# Altium PCB ZIF_to_2xZIF.PcbDoc (part 2 of 3)
Units mil, origin at the board's own origin, x right, y up, seen from the top; angles counter-clockwise.
Board outline 1622.05 x 16535.43 mil, 2 copper layers (Top Layer, Bottom Layer), stack 3.189 mil thick; 3 components, 51 nets, 153 pads, 51 vias.
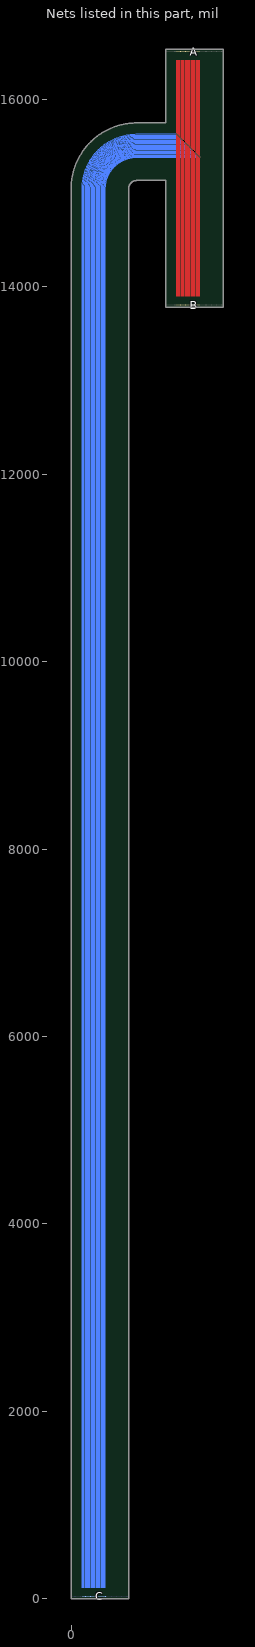
[diagram p2: the nets of this part, all layers, seen from the top]

## Via types
v1: diameter 11.81, hole 3.94, Top Layer to Bottom Layer, 51 vias

## Nets (pads, with @x,y where several pads share a name; then routed paths per layer and width w, separated by ;. In a path a pad name is that pad's centre, name@x,y a point inside that pad or via, vN(x,y) a via of type N, cw(c..) or ccw(c..) an arc to the next point about the centre after c; other vN are vias at no path point) (continued)
FPC_10: A.10 B.10 C.10 | length 18783.4
  Top Layer w3.94: 1125.98,15110.24 1125.98,15759.84
  Top Layer w7.87: 1125.98,13899.61 1125.98,15110.24 ; 1125.98,15759.84 1125.98,16415.35
  Bottom Layer w3.94: 118.11,14881.89 118.11,15047.24 118.2,15057.41 118.47,15067.58 118.91,15077.74 119.53,15087.89 120.33,15098.03 121.3,15108.15 122.45,15118.25 123.78,15128.34 125.28,15138.39 126.96,15148.42 128.82,15158.42 130.84,15168.39 133.04,15178.32 135.42,15188.21 137.96,15198.05 140.68,15207.85 143.57,15217.6 146.63,15227.3 149.86,15236.95 153.25,15246.53 156.81,15256.06 160.54,15265.52 164.43,15274.91 168.49,15284.24 172.7,15293.49 177.08,15302.67 181.62,15311.77 186.31,15320.79 191.17,15329.73 196.17,15338.58 201.34,15347.34 206.65,15356.02 212.11,15364.59 217.73,15373.07 223.49,15381.45 229.39,15389.73 235.44,15397.91 241.63,15405.98 247.96,15413.93 254.43,15421.78 261.04,15429.51 267.77,15437.13 274.64,15444.63 281.64,15452.01 288.77,15459.26 296.03,15466.39 303.4,15473.39 310.9,15480.26 318.52,15487 326.25,15493.6 334.1,15500.07 342.06,15506.4 350.12,15512.59 358.3,15518.64 366.58,15524.55 374.96,15530.31 383.44,15535.92 392.02,15541.38 400.69,15546.7 409.45,15551.86 418.3,15556.86 427.24,15561.72 436.26,15566.41 445.36,15570.95 454.54,15575.33 463.79,15579.55 473.12,15583.6 482.51,15587.49 491.97,15591.22 501.5,15594.78 511.09,15598.18 520.73,15601.4 530.43,15604.46 540.18,15607.35 549.98,15610.07 559.83,15612.61 569.71,15614.99 579.64,15617.19 589.61,15619.22 599.61,15621.07 609.64,15622.75 619.69,15624.25 629.78,15625.58 639.88,15626.73 650,15627.7 660.14,15628.5 670.29,15629.12 680.45,15629.57 690.62,15629.83 700.79,15629.92 v1(1125.98,15629.92)
  Bottom Layer w7.87: 118.11,120.08 118.11,14881.89
FPC_11: A.11 B.11 C.11 | length 18776.6
  Top Layer w3.94: 1137.8,15110.24 1137.8,15759.84
  Top Layer w7.87: 1137.8,13899.61 1137.8,15110.24 ; 1137.8,15759.84 1137.8,16415.35
  Bottom Layer w3.94: 129.92,14881.89 129.92,15047.24 130.01,15057.21 130.27,15067.17 130.7,15077.12 131.31,15087.07 132.09,15097 133.05,15106.92 134.18,15116.82 135.48,15126.69 136.95,15136.55 138.59,15146.37 140.41,15156.17 142.4,15165.93 144.55,15175.66 146.88,15185.35 149.37,15195 152.04,15204.6 154.87,15214.15 157.86,15223.65 161.02,15233.1 164.35,15242.49 167.84,15251.82 171.49,15261.09 175.3,15270.3 179.28,15279.44 183.41,15288.5 187.7,15297.5 192.14,15306.41 196.74,15315.25 201.5,15324.01 206.4,15332.68 211.46,15341.26 216.67,15349.76 222.02,15358.16 227.52,15366.47 233.16,15374.68 238.95,15382.79 244.87,15390.8 250.94,15398.7 257.14,15406.5 263.48,15414.19 269.95,15421.77 276.55,15429.23 283.28,15436.57 290.14,15443.8 297.12,15450.91 304.23,15457.89 311.46,15464.75 318.8,15471.48 326.27,15478.08 333.84,15484.55 341.53,15490.89 349.33,15497.09 357.23,15503.16 365.24,15509.08 373.35,15514.87 381.56,15520.51 389.87,15526.01 398.27,15531.37 406.77,15536.57 415.35,15541.63 424.03,15546.53 432.78,15551.29 441.62,15555.89 450.54,15560.34 459.53,15564.62 468.6,15568.76 477.73,15572.73 486.94,15576.54 496.21,15580.19 505.54,15583.68 514.93,15587.01 524.38,15590.17 533.88,15593.17 543.44,15596 553.04,15598.66 562.68,15601.15 572.37,15603.48 582.1,15605.64 591.86,15607.62 601.66,15609.44 611.48,15611.08 621.34,15612.55 631.22,15613.86 641.12,15614.98 651.03,15615.94 660.97,15616.72 670.91,15617.33 680.86,15617.76 690.82,15618.02 700.79,15618.11 v1(1137.8,15618.11)
  Bottom Layer w7.87: 129.92,120.08 129.92,14881.89
FPC_12: A.12 B.12 C.12 | length 18769.9
  Top Layer w3.94: 1149.61,15110.24 1149.61,15759.84
  Top Layer w7.87: 1149.61,13899.61 1149.61,15110.24 ; 1149.61,15759.84 1149.61,16415.35
  Bottom Layer w3.94: 141.73,14881.89 141.73,15047.24 141.82,15057 142.07,15066.75 142.5,15076.5 143.09,15086.24 143.86,15095.97 144.79,15105.68 145.9,15115.38 147.17,15125.05 148.62,15134.7 150.23,15144.32 152,15153.92 153.95,15163.48 156.06,15173 158.34,15182.49 160.78,15191.94 163.39,15201.34 166.16,15210.7 169.09,15220 172.19,15229.25 175.45,15238.45 178.86,15247.59 182.44,15256.67 186.17,15265.68 190.07,15274.63 194.11,15283.51 198.31,15292.32 202.67,15301.05 207.17,15309.7 211.83,15318.28 216.63,15326.77 221.58,15335.18 226.68,15343.5 231.92,15351.73 237.31,15359.86 242.84,15367.9 248.5,15375.85 254.31,15383.69 260.25,15391.43 266.32,15399.07 272.53,15406.6 278.86,15414.02 285.33,15421.33 291.92,15428.52 298.64,15435.6 305.48,15442.56 312.44,15449.39 319.51,15456.11 326.71,15462.7 334.01,15469.17 341.43,15475.51 348.96,15481.71 356.6,15487.79 364.34,15493.73 372.18,15499.53 380.13,15505.2 388.17,15510.72 396.3,15516.11 404.53,15521.35 412.85,15526.45 421.26,15531.4 429.75,15536.2 438.33,15540.86 446.98,15545.37 455.71,15549.72 464.52,15553.92 473.4,15557.97 482.35,15561.86 491.36,15565.59 500.44,15569.17 509.58,15572.58 518.78,15575.84 528.03,15578.94 537.34,15581.87 546.69,15584.64 556.09,15587.25 565.54,15589.69 575.03,15591.97 584.55,15594.08 594.11,15596.03 603.71,15597.81 613.33,15599.42 622.98,15600.86 632.66,15602.13 642.35,15603.24 652.06,15604.17 661.79,15604.94 671.53,15605.53 681.28,15605.96 691.03,15606.21 700.79,15606.3 v1(1149.61,15606.3)
  Bottom Layer w7.87: 141.73,120.08 141.73,14881.89
FPC_13: A.13 B.13 C.13 | length 18763.1
  Top Layer w3.94: 1161.42,15110.24 1161.42,15759.84
  Top Layer w7.87: 1161.42,13899.61 1161.42,15110.24 ; 1161.42,15759.84 1161.42,16415.35
  Bottom Layer w3.94: 153.54,14881.89 153.54,15047.24 153.63,15056.79 153.88,15066.34 154.29,15075.88 154.88,15085.42 155.63,15094.94 156.54,15104.45 157.62,15113.94 158.87,15123.41 160.28,15132.85 161.86,15142.27 163.6,15151.66 165.5,15161.02 167.57,15170.35 169.8,15179.63 172.19,15188.88 174.74,15198.08 177.46,15207.24 180.33,15216.35 183.36,15225.41 186.55,15234.41 189.89,15243.36 193.39,15252.25 197.05,15261.07 200.85,15269.83 204.82,15278.52 208.93,15287.14 213.19,15295.69 217.6,15304.16 222.16,15312.55 226.86,15320.87 231.71,15329.1 236.7,15337.24 241.83,15345.29 247.1,15353.26 252.51,15361.13 258.06,15368.91 263.74,15376.58 269.55,15384.16 275.5,15391.64 281.57,15399.01 287.78,15406.27 294.11,15413.42 300.56,15420.46 307.13,15427.39 313.83,15434.2 320.64,15440.9 327.57,15447.47 334.61,15453.93 341.76,15460.25 349.03,15466.46 356.4,15472.53 363.87,15478.48 371.45,15484.29 379.13,15489.97 386.9,15495.52 394.77,15500.93 402.74,15506.2 410.79,15511.33 418.94,15516.32 427.17,15521.17 435.48,15525.87 443.87,15530.43 452.34,15534.84 460.89,15539.1 469.51,15543.22 478.2,15547.18 486.96,15550.98 495.79,15554.64 504.67,15558.14 513.62,15561.49 522.62,15564.67 531.68,15567.7 540.79,15570.58 549.95,15573.29 559.15,15575.84 568.4,15578.23 577.68,15580.46 587.01,15582.53 596.37,15584.43 605.76,15586.17 615.18,15587.75 624.63,15589.16 634.1,15590.41 643.58,15591.49 653.09,15592.41 662.61,15593.16 672.15,15593.74 681.69,15594.15 691.24,15594.4 700.79,15594.49 v1(1161.42,15594.49)
  Bottom Layer w7.87: 153.54,120.08 153.54,14881.89
FPC_14: A.14 B.14 C.14 | length 18756.4
  Top Layer w3.94: 1173.23,15110.24 1173.23,15759.84
  Top Layer w7.87: 1173.23,13899.61 1173.23,15110.24 ; 1173.23,15759.84 1173.23,16415.35
  Bottom Layer w3.94: 165.35,14881.89 165.35,15047.24 165.44,15056.59 165.68,15065.93 166.09,15075.27 166.66,15084.59 167.39,15093.91 168.29,15103.21 169.35,15112.5 170.57,15121.76 171.95,15131 173.49,15140.22 175.19,15149.41 177.05,15158.57 179.08,15167.69 181.26,15176.78 183.6,15185.82 186.1,15194.83 188.75,15203.79 191.56,15212.7 194.53,15221.56 197.64,15230.37 200.92,15239.13 204.34,15247.82 207.92,15256.45 211.65,15265.02 215.52,15273.53 219.54,15281.96 223.71,15290.33 228.03,15298.61 232.49,15306.83 237.09,15314.96 241.83,15323.01 246.71,15330.98 251.74,15338.86 256.89,15346.65 262.19,15354.36 267.61,15361.96 273.17,15369.48 278.86,15376.89 284.68,15384.2 290.62,15391.41 296.69,15398.52 302.88,15405.52 309.2,15412.41 315.63,15419.19 322.18,15425.85 328.84,15432.4 335.62,15438.84 342.51,15445.15 349.51,15451.34 356.62,15457.41 363.83,15463.35 371.14,15469.17 378.56,15474.86 386.07,15480.42 393.68,15485.85 401.38,15491.14 409.17,15496.3 417.05,15501.32 425.02,15506.2 433.07,15510.94 441.2,15515.54 449.42,15520 457.71,15524.32 466.07,15528.49 474.5,15532.51 483.01,15536.39 491.58,15540.11 500.21,15543.69 508.91,15547.11 517.66,15550.39 526.47,15553.51 535.33,15556.47 544.24,15559.28 553.2,15561.94 562.21,15564.43 571.25,15566.77 580.34,15568.95 589.46,15570.98 598.62,15572.84 607.81,15574.54 617.03,15576.09 626.27,15577.47 635.53,15578.69 644.82,15579.74 654.12,15580.64 663.44,15581.37 672.76,15581.94 682.1,15582.35 691.44,15582.6 700.79,15582.68 v1(1173.23,15582.68)
  Bottom Layer w7.87: 165.35,120.08 165.35,14881.89
FPC_15: A.15 B.15 C.15 | length 18749.7
  Top Layer w3.94: 1185.04,15110.24 1185.04,15759.84
  Top Layer w7.87: 1185.04,13899.61 1185.04,15110.24 ; 1185.04,15759.84 1185.04,16415.35
  Bottom Layer w3.94: 177.17,14881.89 177.17,15047.24 177.25,15056.38 177.48,15065.52 177.88,15074.65 178.44,15083.77 179.16,15092.88 180.03,15101.98 181.07,15111.06 182.26,15120.12 183.61,15129.16 185.12,15138.17 186.79,15147.16 188.61,15156.11 190.59,15165.03 192.72,15173.92 195.01,15182.77 197.45,15191.57 200.05,15200.34 202.79,15209.05 205.69,15217.72 208.74,15226.33 211.94,15234.89 215.29,15243.4 218.79,15251.84 222.43,15260.22 226.22,15268.54 230.16,15276.78 234.24,15284.96 238.46,15293.07 242.82,15301.1 247.32,15309.06 251.96,15316.93 256.73,15324.72 261.64,15332.43 266.69,15340.05 271.86,15347.58 277.17,15355.02 282.6,15362.37 288.17,15369.62 293.86,15376.77 299.67,15383.82 305.6,15390.77 311.66,15397.62 317.83,15404.35 324.13,15410.98 330.53,15417.5 337.05,15423.91 343.68,15430.2 350.42,15436.37 357.26,15442.43 364.21,15448.36 371.26,15454.17 378.41,15459.86 385.66,15465.43 393.01,15470.86 400.45,15476.17 407.98,15481.35 415.6,15486.39 423.31,15491.3 431.1,15496.08 438.98,15500.71 446.93,15505.21 454.96,15509.57 463.07,15513.79 471.25,15517.87 479.5,15521.81 487.81,15525.6 496.19,15529.24 504.64,15532.74 513.14,15536.09 521.7,15539.29 530.31,15542.34 538.98,15545.24 547.7,15547.99 556.46,15550.58 565.26,15553.02 574.11,15555.31 583,15557.45 591.92,15559.42 600.88,15561.25 609.86,15562.91 618.87,15564.42 627.91,15565.77 636.97,15566.96 646.05,15568 655.15,15568.87 664.26,15569.59 673.38,15570.15 682.51,15570.55 691.65,15570.79 700.79,15570.87 v1(1185.04,15570.87)
  Bottom Layer w7.87: 177.17,120.08 177.17,14881.89
FPC_16: A.16 B.16 C.16 | length 18742.9
  Top Layer w3.94: 1196.85,15110.24 1196.85,15759.84
  Top Layer w7.87: 1196.85,13899.61 1196.85,15110.24 ; 1196.85,15759.84 1196.85,16415.35
  Bottom Layer w3.94: 188.98,14881.89 188.98,15047.24 189.05,15056.18 189.29,15065.11 189.68,15074.03 190.22,15082.95 190.92,15091.85 191.78,15100.74 192.79,15109.62 193.96,15118.47 195.28,15127.31 196.75,15136.12 198.38,15144.9 200.16,15153.66 202.09,15162.38 204.18,15171.06 206.42,15179.71 208.8,15188.32 211.34,15196.88 214.03,15205.4 216.86,15213.87 219.84,15222.29 222.97,15230.66 226.24,15238.97 229.66,15247.22 233.22,15255.42 236.93,15263.54 240.77,15271.61 244.76,15279.6 248.89,15287.52 253.15,15295.38 257.55,15303.15 262.08,15310.85 266.75,15318.46 271.55,15326 276.48,15333.45 281.54,15340.81 286.72,15348.08 292.04,15355.26 297.47,15362.35 303.04,15369.34 308.72,15376.23 314.52,15383.02 320.44,15389.71 326.47,15396.3 332.62,15402.78 338.88,15409.15 345.25,15415.41 351.73,15421.56 358.32,15427.59 365.01,15433.51 371.8,15439.31 378.69,15445 385.69,15450.56 392.77,15455.99 399.95,15461.31 407.22,15466.5 414.59,15471.55 422.04,15476.48 429.57,15481.28 437.19,15485.95 444.88,15490.49 452.66,15494.88 460.51,15499.15 468.43,15503.27 476.42,15507.26 484.49,15511.1 492.62,15514.81 500.81,15518.37 509.06,15521.79 517.37,15525.06 525.74,15528.19 534.16,15531.17 542.63,15534.01 551.15,15536.69 559.71,15539.23 568.32,15541.62 576.97,15543.85 585.65,15545.94 594.38,15547.87 603.13,15549.65 611.91,15551.28 620.72,15552.75 629.56,15554.07 638.41,15555.24 647.29,15556.25 656.18,15557.11 665.09,15557.81 674,15558.35 682.93,15558.74 691.86,15558.98 700.79,15559.06 v1(1196.85,15559.06)
  Bottom Layer w7.87: 188.98,120.08 188.98,14881.89
FPC_17: A.17 B.17 C.17 | length 18736.2
  Top Layer w3.94: 1208.66,15110.24 1208.66,15759.84
  Top Layer w7.87: 1208.66,13899.61 1208.66,15110.24 ; 1208.66,15759.84 1208.66,16415.35
  Bottom Layer w3.94: 200.79,14881.89 200.79,15047.24 200.86,15055.97 201.09,15064.69 201.47,15073.41 202.01,15082.12 202.69,15090.82 203.53,15099.51 204.51,15108.18 205.65,15116.83 206.94,15125.46 208.38,15134.07 209.97,15142.65 211.71,15151.2 213.6,15159.72 215.64,15168.2 217.82,15176.65 220.16,15185.06 222.63,15193.43 225.26,15201.75 228.03,15210.03 230.94,15218.25 234,15226.43 237.2,15234.55 240.53,15242.61 244.01,15250.61 247.63,15258.55 251.39,15266.43 255.28,15274.24 259.31,15281.98 263.48,15289.65 267.77,15297.24 272.2,15304.76 276.76,15312.2 281.45,15319.56 286.27,15326.84 291.21,15334.03 296.28,15341.14 301.47,15348.15 306.78,15355.07 312.21,15361.9 317.77,15368.64 323.43,15375.27 329.21,15381.81 335.11,15388.24 341.12,15394.57 347.23,15400.8 353.46,15406.91 359.79,15412.92 366.22,15418.82 372.76,15424.6 379.39,15430.27 386.13,15435.82 392.96,15441.25 399.88,15446.56 406.89,15451.75 414,15456.82 421.19,15461.76 428.47,15466.58 435.83,15471.27 443.27,15475.83 450.79,15480.26 458.38,15484.55 466.05,15488.72 473.79,15492.75 481.6,15496.64 489.48,15500.4 497.42,15504.02 505.42,15507.5 513.48,15510.84 521.6,15514.03 529.78,15517.09 538,15520 546.28,15522.77 554.6,15525.4 562.97,15527.87 571.38,15530.21 579.83,15532.39 588.31,15534.43 596.83,15536.32 605.38,15538.06 613.96,15539.65 622.57,15541.09 631.2,15542.38 639.85,15543.52 648.52,15544.5 657.21,15545.34 665.91,15546.03 674.62,15546.56 683.34,15546.94 692.06,15547.17 700.79,15547.24 v1(1208.66,15547.24)
  Bottom Layer w7.87: 200.79,120.08 200.79,14881.89
FPC_18: A.18 B.18 C.18 | length 18729.4
  Top Layer w3.94: 1220.47,15110.24 1220.47,15759.84
  Top Layer w7.87: 1220.47,13899.61 1220.47,15110.24 ; 1220.47,15759.84 1220.47,16415.35
  Bottom Layer w3.94: 212.6,14881.89 212.6,15047.24 212.67,15055.76 212.9,15064.28 213.27,15072.79 213.79,15081.3 214.46,15089.79 215.27,15098.27 216.24,15106.74 217.35,15115.19 218.61,15123.61 220.02,15132.02 221.57,15140.39 223.27,15148.74 225.11,15157.06 227.1,15165.35 229.23,15173.6 231.51,15181.81 233.93,15189.98 236.49,15198.1 239.2,15206.18 242.04,15214.21 245.02,15222.2 248.15,15230.12 251.41,15237.99 254.8,15245.81 258.34,15253.56 262.01,15261.25 265.81,15268.88 269.74,15276.43 273.81,15283.92 278,15291.34 282.33,15298.68 286.78,15305.94 291.36,15313.13 296.06,15320.24 300.89,15327.26 305.83,15334.19 310.9,15341.04 316.09,15347.8 321.39,15354.47 326.81,15361.05 332.35,15367.52 337.99,15373.91 343.75,15380.19 349.61,15386.37 355.59,15392.45 361.66,15398.42 367.84,15404.28 374.13,15410.04 380.51,15415.68 386.99,15421.22 393.56,15426.64 400.23,15431.94 406.99,15437.13 413.84,15442.2 420.77,15447.15 427.8,15451.97 434.9,15456.67 442.09,15461.25 449.35,15465.7 456.69,15470.03 464.11,15474.22 471.6,15478.29 479.15,15482.22 486.78,15486.03 494.47,15489.69 502.22,15493.23 510.04,15496.62 517.91,15499.89 525.84,15503.01 533.82,15505.99 541.85,15508.84 549.93,15511.54 558.05,15514.1 566.22,15516.52 574.43,15518.8 582.68,15520.93 590.97,15522.92 599.29,15524.76 607.64,15526.46 616.01,15528.02 624.42,15529.42 632.84,15530.68 641.29,15531.79 649.76,15532.76 658.24,15533.58 666.73,15534.24 675.24,15534.76 683.75,15535.14 692.27,15535.36 700.79,15535.43 v1(1220.47,15535.43)
  Bottom Layer w7.87: 212.6,120.08 212.6,14881.89
FPC_19: A.19 B.19 C.19 | length 18722.7
  Top Layer w3.94: 1232.28,15110.24 1232.28,15759.84
  Top Layer w7.87: 1232.28,13899.61 1232.28,15110.24 ; 1232.28,15759.84 1232.28,16415.35
  Bottom Layer w3.94: 224.41,14881.89 224.41,15047.24 224.48,15055.56 224.7,15063.87 225.06,15072.18 225.57,15080.47 226.22,15088.76 227.02,15097.04 227.96,15105.3 229.05,15113.54 230.27,15121.77 231.65,15129.97 233.16,15138.14 234.82,15146.29 236.62,15154.41 238.56,15162.49 240.64,15170.54 242.86,15178.55 245.22,15186.52 247.72,15194.45 250.36,15202.34 253.14,15210.17 256.05,15217.96 259.1,15225.7 262.28,15233.38 265.59,15241 269.04,15248.57 272.62,15256.07 276.33,15263.52 280.17,15270.89 284.14,15278.2 288.23,15285.43 292.45,15292.6 296.8,15299.69 301.26,15306.7 305.85,15313.63 310.56,15320.48 315.39,15327.25 320.34,15333.94 325.4,15340.53 330.57,15347.04 335.86,15353.45 341.26,15359.78 346.77,15366 352.39,15372.13 358.11,15378.16 363.94,15384.09 369.87,15389.92 375.9,15395.64 382.03,15401.26 388.26,15406.77 394.58,15412.17 400.99,15417.46 407.5,15422.64 414.1,15427.7 420.78,15432.64 427.55,15437.47 434.4,15442.18 441.33,15446.77 448.35,15451.24 455.43,15455.58 462.6,15459.8 469.83,15463.89 477.14,15467.86 484.52,15471.7 491.96,15475.41 499.46,15478.99 507.03,15482.44 514.65,15485.75 522.33,15488.93 530.07,15491.98 537.86,15494.89 545.69,15497.67 553.58,15500.31 561.51,15502.81 569.48,15505.17 577.49,15507.39 585.54,15509.47 593.63,15511.41 601.74,15513.21 609.89,15514.87 618.07,15516.38 626.27,15517.76 634.49,15518.99 642.73,15520.07 650.99,15521.01 659.27,15521.81 667.56,15522.46 675.86,15522.97 684.16,15523.33 692.47,15523.55 700.79,15523.62 v1(1232.28,15523.62)
  Bottom Layer w7.87: 224.41,120.08 224.41,14881.89
FPC_20: A.20 B.20 C.20 | length 18716
  Top Layer w3.94: 1244.09,15110.24 1244.09,15759.84
  Top Layer w7.87: 1244.09,13899.61 1244.09,15110.24 ; 1244.09,15759.84 1244.09,16415.35
  Bottom Layer w3.94: 236.22,14881.89 236.22,15047.24 236.29,15055.35 236.5,15063.46 236.86,15071.56 237.35,15079.65 237.99,15087.73 238.77,15095.8 239.68,15103.86 240.74,15111.9 241.94,15119.92 243.28,15127.92 244.76,15135.89 246.37,15143.83 248.13,15151.75 250.02,15159.63 252.05,15167.48 254.22,15175.3 256.52,15183.07 258.96,15190.8 261.53,15198.49 264.24,15206.14 267.08,15213.73 270.05,15221.27 273.15,15228.76 276.38,15236.2 279.75,15243.58 283.24,15250.9 286.86,15258.15 290.6,15265.35 294.47,15272.47 298.46,15279.53 302.58,15286.51 306.81,15293.43 311.17,15300.27 315.64,15307.03 320.24,15313.71 324.94,15320.31 329.77,15326.83 334.7,15333.26 339.75,15339.61 344.91,15345.86 350.17,15352.03 355.55,15358.1 361.02,15364.08 366.61,15369.96 372.29,15375.74 378.07,15381.43 383.95,15387.01 389.93,15392.48 396,15397.86 402.17,15403.12 408.43,15408.28 414.77,15413.33 421.2,15418.26 427.72,15423.09 434.32,15427.8 441,15432.39 447.77,15436.86 454.6,15441.22 461.52,15445.46 468.5,15449.57 475.56,15453.56 482.69,15457.43 489.88,15461.18 497.13,15464.79 504.45,15468.28 511.83,15471.65 519.27,15474.88 526.76,15477.98 534.3,15480.95 541.9,15483.79 549.54,15486.5 557.23,15489.07 564.96,15491.51 572.74,15493.81 580.55,15495.98 588.4,15498.01 596.28,15499.9 604.2,15501.66 612.14,15503.28 620.12,15504.75 628.11,15506.09 636.13,15507.29 644.17,15508.35 652.23,15509.27 660.3,15510.04 668.38,15510.68 676.47,15511.17 684.57,15511.53 692.68,15511.74 700.79,15511.81 v1(1244.09,15511.81)
  Bottom Layer w7.87: 236.22,120.08 236.22,14881.89
FPC_21: A.21 B.21 C.21 | length 18709.2
  Top Layer w3.94: 1255.91,15110.24 1255.91,15759.84
  Top Layer w7.87: 1255.91,13899.61 1255.91,15110.24 ; 1255.91,15759.84 1255.91,16415.35
  Bottom Layer w3.94: 248.03,14881.89 248.03,15047.24 248.1,15055.15 248.31,15063.05 248.65,15070.94 249.13,15078.83 249.75,15086.7 250.51,15094.57 251.41,15102.42 252.44,15110.26 253.61,15118.07 254.91,15125.86 256.35,15133.63 257.93,15141.38 259.64,15149.09 261.48,15156.78 263.46,15164.43 265.57,15172.04 267.81,15179.62 270.19,15187.15 272.7,15194.65 275.34,15202.1 278.1,15209.5 281,15216.85 284.02,15224.15 287.17,15231.4 290.45,15238.59 293.85,15245.72 297.38,15252.79 301.03,15259.8 304.8,15266.74 308.69,15273.62 312.7,15280.43 316.83,15287.17 321.07,15293.83 325.44,15300.42 329.91,15306.93 334.5,15313.37 339.2,15319.72 344.01,15325.99 348.93,15332.17 353.96,15338.27 359.09,15344.28 364.32,15350.2 369.66,15356.02 375.1,15361.75 380.64,15367.39 386.28,15372.93 392.01,15378.37 397.83,15383.71 403.75,15388.94 409.76,15394.08 415.86,15399.1 422.04,15404.02 428.31,15408.83 434.66,15413.53 441.1,15418.12 447.61,15422.6 454.2,15426.96 460.86,15431.2 467.6,15435.33 474.41,15439.34 481.29,15443.23 488.23,15447 495.24,15450.65 502.31,15454.18 509.44,15457.58 516.63,15460.86 523.88,15464.01 531.18,15467.03 538.53,15469.93 545.94,15472.7 553.38,15475.33 560.88,15477.84 568.41,15480.22 575.99,15482.46 583.61,15484.57 591.26,15486.55 598.94,15488.4 606.65,15490.11 614.4,15491.68 622.17,15493.12 629.96,15494.43 637.78,15495.59 645.61,15496.63 653.46,15497.52 661.33,15498.28 669.2,15498.9 677.09,15499.38 684.99,15499.72 692.89,15499.93 700.79,15500 v1(1255.91,15500)
  Bottom Layer w7.87: 248.03,120.08 248.03,14881.89
FPC_22: A.22 B.22 C.22 | length 18702.5
  Top Layer w3.94: 1267.72,15110.24 1267.72,15759.84
  Top Layer w7.87: 1267.72,13899.61 1267.72,15110.24 ; 1267.72,15759.84 1267.72,16415.35
  Bottom Layer w3.94: 259.84,14881.89 259.84,15047.24 259.91,15054.94 260.11,15062.63 260.45,15070.32 260.92,15078 261.52,15085.67 262.26,15093.34 263.13,15100.98 264.13,15108.61 265.27,15116.22 266.54,15123.81 267.94,15131.38 269.48,15138.92 271.14,15146.44 272.94,15153.92 274.87,15161.37 276.92,15168.78 279.11,15176.16 281.42,15183.5 283.87,15190.8 286.43,15198.06 289.13,15205.26 291.95,15212.42 294.9,15219.53 297.96,15226.59 301.16,15233.6 304.47,15240.54 307.9,15247.43 311.46,15254.26 315.13,15261.02 318.92,15267.72 322.82,15274.35 326.84,15280.91 330.98,15287.4 335.23,15293.82 339.59,15300.16 344.06,15306.42 348.63,15312.61 353.32,15318.72 358.11,15324.74 363,15330.68 368,15336.53 373.1,15342.29 378.3,15347.97 383.6,15353.55 388.99,15359.04 394.48,15364.43 400.06,15369.73 405.74,15374.93 411.5,15380.03 417.35,15385.03 423.29,15389.92 429.31,15394.71 435.42,15399.4 441.61,15403.98 447.87,15408.44 454.21,15412.8 460.63,15417.05 467.12,15421.19 473.68,15425.21 480.31,15429.11 487.01,15432.9 493.78,15436.58 500.6,15440.13 507.49,15443.56 514.44,15446.88 521.44,15450.07 528.5,15453.14 535.61,15456.08 542.77,15458.9 549.98,15461.6 557.23,15464.17 564.53,15466.61 571.87,15468.92 579.25,15471.11 586.66,15473.16 594.11,15475.09 601.6,15476.89 609.11,15478.55 616.65,15480.09 624.22,15481.49 631.81,15482.76 639.42,15483.9 647.05,15484.9 654.7,15485.77 662.36,15486.51 670.03,15487.11 677.71,15487.58 685.4,15487.92 693.09,15488.12 700.79,15488.19 v1(1267.72,15488.19)
  Bottom Layer w7.87: 259.84,120.08 259.84,14881.89
FPC_23: A.23 B.23 C.23 | length 18695.7
  Top Layer w3.94: 1279.53,15110.24 1279.53,15759.84
  Top Layer w7.87: 1279.53,13899.61 1279.53,15110.24 ; 1279.53,15759.84 1279.53,16415.35
  Bottom Layer w3.94: 271.65,14881.89 271.65,15047.24 271.72,15054.73 271.92,15062.22 272.24,15069.7 272.7,15077.18 273.29,15084.65 274,15092.1 274.85,15099.54 275.83,15106.97 276.94,15114.38 278.17,15121.76 279.54,15129.13 281.03,15136.47 282.65,15143.78 284.4,15151.06 286.28,15158.31 288.28,15165.53 290.4,15172.71 292.66,15179.85 295.03,15186.96 297.53,15194.02 300.16,15201.03 302.9,15208 305.77,15214.92 308.75,15221.79 311.86,15228.6 315.08,15235.36 318.43,15242.07 321.88,15248.71 325.46,15255.29 329.15,15261.81 332.95,15268.26 336.86,15274.65 340.89,15280.97 345.02,15287.21 349.26,15293.39 353.61,15299.48 358.07,15305.5 362.63,15311.45 367.29,15317.31 372.05,15323.09 376.92,15328.78 381.88,15334.39 386.94,15339.91 392.09,15345.35 397.34,15350.69 402.69,15355.94 408.12,15361.09 413.64,15366.15 419.25,15371.12 424.95,15375.98 430.72,15380.74 436.59,15385.41 442.53,15389.97 448.55,15394.42 454.65,15398.77 460.82,15403.01 467.06,15407.15 473.38,15411.17 479.77,15415.08 486.22,15418.88 492.74,15422.57 499.32,15426.15 505.96,15429.61 512.67,15432.95 519.43,15436.17 526.24,15439.28 533.11,15442.26 540.03,15445.13 547,15447.88 554.01,15450.5 561.08,15453 568.18,15455.37 575.32,15457.63 582.5,15459.75 589.72,15461.76 596.97,15463.63 604.25,15465.38 611.57,15467 618.9,15468.49 626.27,15469.86 633.66,15471.09 641.06,15472.2 648.49,15473.18 655.93,15474.03 663.39,15474.75 670.85,15475.33 678.33,15475.79 685.81,15476.12 693.3,15476.31 700.79,15476.38 v1(1279.53,15476.38)
  Bottom Layer w7.87: 271.65,120.08 271.65,14881.89
FPC_24: A.24 B.24 C.24 | length 18689
  Top Layer w3.94: 1291.34,15110.24 1291.34,15759.84
  Top Layer w7.87: 1291.34,13899.61 1291.34,15110.24 ; 1291.34,15759.84 1291.34,16415.35
  Bottom Layer w3.94: 283.46,14881.89 283.46,15047.24 283.53,15054.53 283.72,15061.81 284.04,15069.09 284.48,15076.36 285.05,15083.62 285.75,15090.87 286.58,15098.1 287.53,15105.32 288.6,15112.53 289.8,15119.71 291.13,15126.87 292.58,15134.01 294.16,15141.12 295.86,15148.2 297.68,15155.26 299.63,15162.27 301.7,15169.26 303.89,15176.2 306.2,15183.11 308.63,15189.98 311.18,15196.8 313.85,15203.58 316.64,15210.31 319.54,15216.98 322.56,15223.61 325.7,15230.19 328.95,15236.7 332.31,15243.17 335.79,15249.57 339.38,15255.91 343.07,15262.18 346.88,15268.39 350.79,15274.53 354.81,15280.61 358.94,15286.61 363.17,15292.54 367.5,15298.4 371.93,15304.17 376.47,15309.87 381.1,15315.49 385.83,15321.03 390.66,15326.49 395.58,15331.86 400.59,15337.14 405.7,15342.34 410.89,15347.44 416.17,15352.45 421.54,15357.38 427,15362.2 432.54,15366.93 438.16,15371.56 443.86,15376.1 449.64,15380.53 455.49,15384.87 461.42,15389.09 467.42,15393.22 473.5,15397.24 479.64,15401.15 485.85,15404.96 492.13,15408.66 498.47,15412.24 504.87,15415.72 511.33,15419.08 517.85,15422.33 524.42,15425.47 531.05,15428.49 537.73,15431.39 544.46,15434.18 551.23,15436.85 558.05,15439.4 564.92,15441.83 571.83,15444.14 578.77,15446.33 585.76,15448.4 592.78,15450.35 599.83,15452.17 606.91,15453.87 614.02,15455.45 621.16,15456.9 628.32,15458.23 635.5,15459.43 642.71,15460.51 649.93,15461.46 657.17,15462.28 664.42,15462.98 671.68,15463.55 678.95,15464 686.22,15464.31 693.5,15464.5 700.79,15464.57 v1(1291.34,15464.57)
  Bottom Layer w7.87: 283.46,120.08 283.46,14881.89
FPC_25: A.25 B.25 C.25 | length 18682.2
  Top Layer w3.94: 1303.15,15110.24 1303.15,15759.84
  Top Layer w7.87: 1303.15,13899.61 1303.15,15110.24 ; 1303.15,15759.84 1303.15,16415.35
  Bottom Layer w3.94: 295.28,14881.89 295.28,15047.24 295.34,15054.32 295.52,15061.4 295.83,15068.47 296.26,15075.53 296.82,15082.59 297.5,15089.63 298.3,15096.66 299.22,15103.68 300.27,15110.68 301.44,15117.66 302.73,15124.62 304.14,15131.55 305.67,15138.46 307.32,15145.35 309.09,15152.2 310.98,15159.02 312.99,15165.8 315.12,15172.55 317.37,15179.27 319.73,15185.94 322.21,15192.57 324.8,15199.15 327.51,15205.69 330.33,15212.18 333.27,15218.62 336.32,15225.01 339.47,15231.34 342.74,15237.62 346.12,15243.84 349.6,15250 353.2,15256.1 356.89,15262.13 360.7,15268.1 364.6,15274 368.61,15279.84 372.72,15285.6 376.93,15291.29 381.24,15296.9 385.65,15302.44 390.15,15307.9 394.74,15313.28 399.43,15318.58 404.21,15323.8 409.09,15328.94 414.05,15333.98 419.1,15338.94 424.23,15343.82 429.45,15348.6 434.75,15353.29 440.13,15357.88 445.59,15362.39 451.13,15366.79 456.74,15371.1 462.43,15375.31 468.2,15379.42 474.03,15383.43 479.93,15387.33 485.9,15391.14 491.93,15394.84 498.03,15398.43 504.19,15401.91 510.41,15405.29 516.69,15408.56 523.02,15411.72 529.41,15414.76 535.85,15417.7 542.34,15420.52 548.88,15423.23 555.47,15425.82 562.09,15428.3 568.77,15430.66 575.48,15432.91 582.23,15435.04 589.01,15437.05 595.83,15438.94 602.69,15440.71 609.57,15442.36 616.48,15443.89 623.41,15445.31 630.37,15446.6 637.35,15447.76 644.35,15448.81 651.37,15449.73 658.4,15450.53 665.44,15451.21 672.5,15451.77 679.56,15452.2 686.64,15452.51 693.71,15452.69 700.79,15452.76 v1(1303.15,15452.76)
  Bottom Layer w7.87: 295.28,120.08 295.28,14881.89
FPC_26: A.26 B.26 C.26 | length 18675.5
  Top Layer w3.94: 1314.96,15110.24 1314.96,15759.84
  Top Layer w7.87: 1314.96,13899.61 1314.96,15110.24 ; 1314.96,15759.84 1314.96,16415.35
  Bottom Layer w3.94: 307.09,14881.89 307.09,15047.24 307.15,15054.12 307.33,15060.98 307.63,15067.85 308.05,15074.71 308.58,15081.56 309.24,15088.4 310.02,15095.22 310.92,15102.04 311.93,15108.83 313.07,15115.61 314.32,15122.37 315.69,15129.1 317.18,15135.81 318.78,15142.49 320.5,15149.14 322.34,15155.76 324.29,15162.35 326.36,15168.9 328.54,15175.42 330.83,15181.9 333.24,15188.33 335.75,15194.73 338.38,15201.08 341.12,15207.38 343.97,15213.63 346.93,15219.83 350,15225.98 353.17,15232.08 356.45,15238.11 359.83,15244.09 363.32,15250.01 366.91,15255.87 370.6,15261.67 374.39,15267.4 378.29,15273.06 382.28,15278.66 386.36,15284.18 390.55,15289.63 394.82,15295.01 399.2,15300.31 403.66,15305.54 408.21,15310.68 412.85,15315.75 417.58,15320.73 422.4,15325.63 427.3,15330.45 432.28,15335.18 437.35,15339.82 442.5,15344.37 447.72,15348.84 453.02,15353.21 458.4,15357.48 463.85,15361.67 469.38,15365.75 474.97,15369.74 480.63,15373.64 486.36,15377.43 492.16,15381.12 498.02,15384.71 503.94,15388.2 509.92,15391.58 515.96,15394.86 522.05,15398.03 528.2,15401.1 534.4,15404.06 540.65,15406.91 546.96,15409.65 553.3,15412.28 559.7,15414.8 566.13,15417.2 572.61,15419.5 579.13,15421.68 585.68,15423.74 592.27,15425.69 598.89,15427.53 605.54,15429.25 612.22,15430.85 618.93,15432.34 625.67,15433.71 632.42,15434.96 639.2,15436.1 645.99,15437.11 652.81,15438.01 659.63,15438.79 666.47,15439.45 673.32,15439.99 680.18,15440.41 687.05,15440.71 693.92,15440.88 700.79,15440.94 v1(1314.96,15440.94)
  Bottom Layer w7.87: 307.09,120.08 307.09,14881.89
FPC_27: A.27 B.27 C.27 | length 18668.8
  Top Layer w3.94: 1326.77,15110.24 1326.77,15759.84
  Top Layer w7.87: 1326.77,13899.61 1326.77,15110.24 ; 1326.77,15759.84 1326.77,16415.35
  Bottom Layer w3.94: 318.9,14881.89 318.9,15047.24 318.96,15053.91 319.13,15060.57 319.42,15067.23 319.83,15073.88 320.35,15080.53 320.99,15087.16 321.74,15093.78 322.61,15100.39 323.6,15106.98 324.7,15113.56 325.91,15120.11 327.24,15126.64 328.69,15133.15 330.24,15139.63 331.91,15146.08 333.69,15152.51 335.58,15158.9 337.59,15165.25 339.7,15171.58 341.93,15177.86 344.26,15184.1 346.71,15190.3 349.26,15196.46 351.91,15202.57 354.68,15208.64 357.55,15214.65 360.52,15220.62 363.6,15226.53 366.78,15232.39 370.06,15238.19 373.44,15243.93 376.93,15249.61 380.51,15255.24 384.19,15260.79 387.96,15266.29 391.83,15271.71 395.8,15277.07 399.85,15282.36 404,15287.58 408.24,15292.72 412.57,15297.79 416.99,15302.78 421.49,15307.69 426.08,15312.53 430.75,15317.28 435.5,15321.95 440.34,15326.54 445.25,15331.04 450.25,15335.46 455.31,15339.79 460.46,15344.03 465.67,15348.18 470.96,15352.23 476.32,15356.2 481.74,15360.07 487.24,15363.85 492.8,15367.52 498.42,15371.1 504.1,15374.59 509.84,15377.97 515.64,15381.25 521.5,15384.43 527.41,15387.51 533.38,15390.48 539.39,15393.35 545.46,15396.12 551.57,15398.78 557.73,15401.33 563.93,15403.77 570.17,15406.1 576.46,15408.33 582.78,15410.44 589.13,15412.45 595.52,15414.34 601.95,15416.12 608.4,15417.79 614.88,15419.35 621.39,15420.79 627.92,15422.12 634.47,15423.33 641.05,15424.43 647.64,15425.42 654.25,15426.29 660.87,15427.04 667.5,15427.68 674.15,15428.2 680.8,15428.61 687.46,15428.9 694.12,15429.08 700.79,15429.13 v1(1326.77,15429.13)
  Bottom Layer w7.87: 318.9,120.08 318.9,14881.89
FPC_28: A.28 B.28 C.28 | length 18662
  Top Layer w3.94: 1338.58,15110.24 1338.58,15759.84
  Top Layer w7.87: 1338.58,13899.61 1338.58,15110.24 ; 1338.58,15759.84 1338.58,16415.35
  Bottom Layer w3.94: 330.71,14881.89 330.71,15047.24 330.76,15053.7 330.93,15060.16 331.22,15066.61 331.61,15073.06 332.12,15079.5 332.74,15085.93 333.47,15092.35 334.31,15098.75 335.26,15105.14 336.33,15111.51 337.51,15117.86 338.8,15124.19 340.19,15130.49 341.7,15136.77 343.32,15143.03 345.04,15149.25 346.88,15155.44 348.82,15161.6 350.87,15167.73 353.03,15173.82 355.29,15179.87 357.66,15185.88 360.13,15191.85 362.7,15197.77 365.38,15203.65 368.16,15209.48 371.04,15215.26 374.03,15220.99 377.11,15226.66 380.29,15232.28 383.57,15237.85 386.94,15243.36 390.41,15248.8 393.98,15254.19 397.64,15259.51 401.39,15264.77 405.23,15269.96 409.16,15275.09 413.18,15280.14 417.29,15285.13 421.49,15290.04 425.77,15294.88 430.13,15299.64 434.57,15304.32 439.1,15308.93 443.71,15313.46 448.39,15317.9 453.16,15322.27 457.99,15326.55 462.91,15330.74 467.89,15334.85 472.94,15338.87 478.07,15342.8 483.26,15346.64 488.52,15350.39 493.84,15354.05 499.23,15357.62 504.68,15361.09 510.18,15364.46 515.75,15367.74 521.37,15370.92 527.05,15374 532.78,15376.99 538.56,15379.87 544.39,15382.65 550.26,15385.33 556.19,15387.9 562.15,15390.38 568.16,15392.74 574.21,15395 580.3,15397.16 586.43,15399.21 592.59,15401.15 598.78,15402.99 605,15404.71 611.26,15406.33 617.54,15407.84 623.84,15409.24 630.17,15410.52 636.52,15411.7 642.89,15412.77 649.28,15413.72 655.69,15414.56 662.1,15415.3 668.53,15415.91 674.97,15416.42 681.42,15416.82 687.87,15417.1 694.33,15417.27 700.79,15417.32 v1(1338.58,15417.32)
  Bottom Layer w7.87: 330.71,120.08 330.71,14881.89
FPC_29: A.29 B.29 C.29 | length 18655.3
  Top Layer w3.94: 1350.39,15110.24 1350.39,15759.84
  Top Layer w7.87: 1350.39,13899.61 1350.39,15110.24 ; 1350.39,15759.84 1350.39,16415.35
  Bottom Layer w3.94: 342.52,14881.89 342.52,15047.24 342.57,15053.5 342.74,15059.75 343.01,15065.99 343.39,15072.24 343.88,15078.47 344.48,15084.69 345.19,15090.91 346.01,15097.11 346.93,15103.29 347.96,15109.46 349.1,15115.6 350.35,15121.73 351.7,15127.84 353.16,15133.92 354.73,15139.97 356.4,15146 358.17,15151.99 360.05,15157.95 362.04,15163.88 364.13,15169.78 366.32,15175.64 368.61,15181.45 371,15187.23 373.49,15192.96 376.09,15198.65 378.78,15204.3 381.57,15209.89 384.46,15215.44 387.44,15220.94 390.52,15226.38 393.69,15231.77 396.96,15237.1 400.32,15242.37 403.77,15247.58 407.31,15252.74 410.94,15257.83 414.66,15262.85 418.47,15267.82 422.36,15272.71 426.34,15277.53 430.4,15282.29 434.54,15286.97 438.77,15291.58 443.07,15296.12 447.45,15300.58 451.91,15304.96 456.45,15309.26 461.06,15313.49 465.74,15317.63 470.5,15321.69 475.32,15325.67 480.22,15329.56 485.18,15333.37 490.2,15337.09 495.29,15340.72 500.45,15344.26 505.66,15347.71 510.93,15351.07 516.27,15354.34 521.65,15357.51 527.1,15360.59 532.59,15363.58 538.14,15366.46 543.73,15369.25 549.38,15371.94 555.07,15374.54 560.8,15377.03 566.58,15379.42 572.4,15381.72 578.25,15383.91 584.15,15385.99 590.08,15387.98 596.04,15389.86 602.04,15391.63 608.06,15393.3 614.11,15394.87 620.19,15396.33 626.3,15397.68 632.43,15398.93 638.57,15400.07 644.74,15401.1 650.93,15402.03 657.13,15402.84 663.34,15403.55 669.56,15404.15 675.8,15404.64 682.04,15405.02 688.28,15405.29 694.53,15405.46 700.79,15405.51 v1(1350.39,15405.51)
  Bottom Layer w7.87: 342.52,120.08 342.52,14881.89
FPC_30: A.30 B.30 C.30 | length 18648.5
  Top Layer w3.94: 1362.2,15110.24 1362.2,15759.84
  Top Layer w7.87: 1362.2,13899.61 1362.2,15110.24 ; 1362.2,15759.84 1362.2,16415.35
  Bottom Layer w3.94: 354.33,14881.89 354.33,15047.24 354.38,15053.29 354.54,15059.34 354.81,15065.38 355.17,15071.41 355.65,15077.44 356.23,15083.46 356.91,15089.47 357.7,15095.46 358.6,15101.44 359.59,15107.41 360.7,15113.35 361.9,15119.28 363.21,15125.18 364.62,15131.06 366.14,15136.91 367.75,15142.74 369.47,15148.54 371.29,15154.31 373.21,15160.04 375.22,15165.74 377.34,15171.4 379.56,15177.03 381.87,15182.62 384.28,15188.16 386.79,15193.66 389.39,15199.12 392.09,15204.53 394.88,15209.9 397.77,15215.21 400.75,15220.47 403.82,15225.68 406.98,15230.84 410.22,15235.94 413.56,15240.98 416.99,15245.96 420.5,15250.89 424.09,15255.75 427.78,15260.54 431.54,15265.28 435.39,15269.94 439.31,15274.54 443.32,15279.07 447.4,15283.53 451.57,15287.91 455.81,15292.23 460.12,15296.46 464.5,15300.63 468.96,15304.71 473.49,15308.72 478.09,15312.65 482.76,15316.49 487.49,15320.26 492.28,15323.94 497.15,15327.53 502.07,15331.04 507.05,15334.47 512.09,15337.81 517.19,15341.06 522.35,15344.22 527.56,15347.28 532.82,15350.26 538.14,15353.15 543.5,15355.94 548.91,15358.64 554.37,15361.24 559.87,15363.75 565.42,15366.16 571,15368.47 576.63,15370.69 582.29,15372.81 587.99,15374.83 593.73,15376.74 599.49,15378.56 605.29,15380.28 611.12,15381.9 616.97,15383.41 622.85,15384.82 628.75,15386.13 634.68,15387.34 640.63,15388.44 646.59,15389.44 652.57,15390.33 658.57,15391.12 664.57,15391.8 670.59,15392.38 676.62,15392.86 682.66,15393.23 688.7,15393.49 694.74,15393.65 700.79,15393.7 v1(1362.2,15393.7)
  Bottom Layer w7.87: 354.33,120.08 354.33,14881.89
FPC_31: A.31 B.31 C.31 | length 18641.8
  Top Layer w3.94: 1374.02,15110.24 1374.02,15759.84
  Top Layer w7.87: 1374.02,13899.61 1374.02,15110.24 ; 1374.02,15759.84 1374.02,16415.35
  Bottom Layer w3.94: 366.14,14881.89 366.14,15047.24 366.19,15053.08 366.35,15058.92 366.6,15064.76 366.96,15070.59 367.42,15076.41 367.98,15082.22 368.64,15088.03 369.4,15093.82 370.26,15099.59 371.23,15105.35 372.29,15111.1 373.45,15116.82 374.72,15122.52 376.08,15128.2 377.54,15133.86 379.11,15139.48 380.76,15145.08 382.52,15150.66 384.37,15156.19 386.32,15161.7 388.37,15167.17 390.51,15172.6 392.74,15178 395.07,15183.36 397.5,15188.67 400.01,15193.94 402.62,15199.17 405.31,15204.35 408.1,15209.48 410.98,15214.57 413.94,15219.6 416.99,15224.58 420.13,15229.51 423.35,15234.38 426.66,15239.19 430.05,15243.94 433.53,15248.64 437.08,15253.27 440.72,15257.84 444.43,15262.35 448.23,15266.79 452.1,15271.17 456.04,15275.47 460.06,15279.71 464.16,15283.87 468.32,15287.97 472.56,15291.99 476.87,15295.93 481.24,15299.8 485.68,15303.6 490.19,15307.31 494.76,15310.95 499.39,15314.5 504.09,15317.98 508.84,15321.37 513.66,15324.68 518.53,15327.9 523.45,15331.04 528.43,15334.09 533.46,15337.06 538.55,15339.93 543.68,15342.72 548.86,15345.42 554.09,15348.02 559.36,15350.54 564.67,15352.96 570.03,15355.29 575.43,15357.52 580.86,15359.66 586.33,15361.71 591.84,15363.66 597.38,15365.51 602.95,15367.27 608.55,15368.93 614.17,15370.49 619.83,15371.95 625.51,15373.31 631.21,15374.58 636.93,15375.74 642.68,15376.81 648.44,15377.77 654.21,15378.63 660,15379.4 665.81,15380.06 671.62,15380.62 677.44,15381.07 683.27,15381.43 689.11,15381.69 694.95,15381.84 700.79,15381.89 v1(1374.02,15381.89)
  Bottom Layer w7.87: 366.14,120.08 366.14,14881.89